# Altium PCB hat_template 2021V3.PcbDoc (part 1 of 2)
Units mm, origin at the board's own origin, x right, y up, seen from the top; angles counter-clockwise.
Board outline 64 x 85 mm, 4 copper layers (Top Side, Ground Plane, Power Plane, Bottom Side), stack 0.844 mm thick; 83 components, 57 nets, 300 pads, 72 vias.
Unrouted connection lines stored in the file: 1.
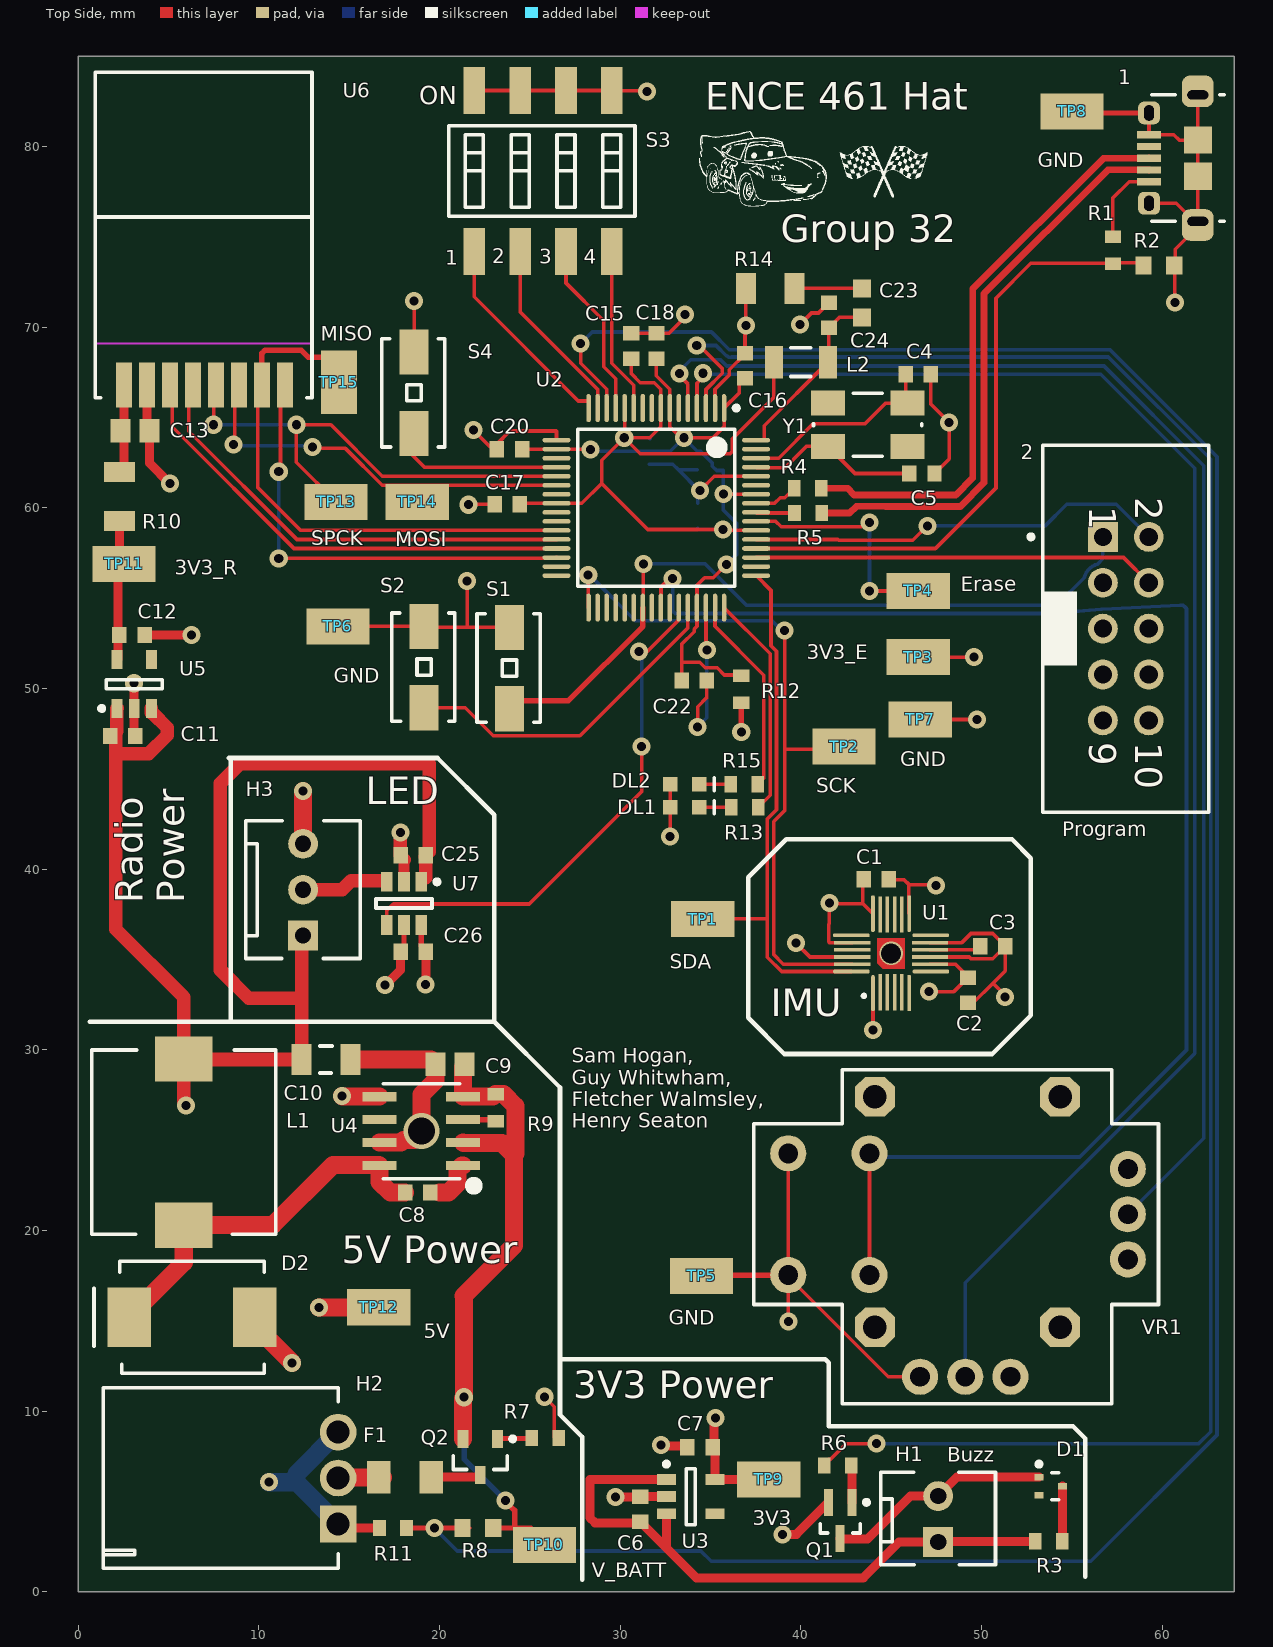
[diagram p0: Top Side view]
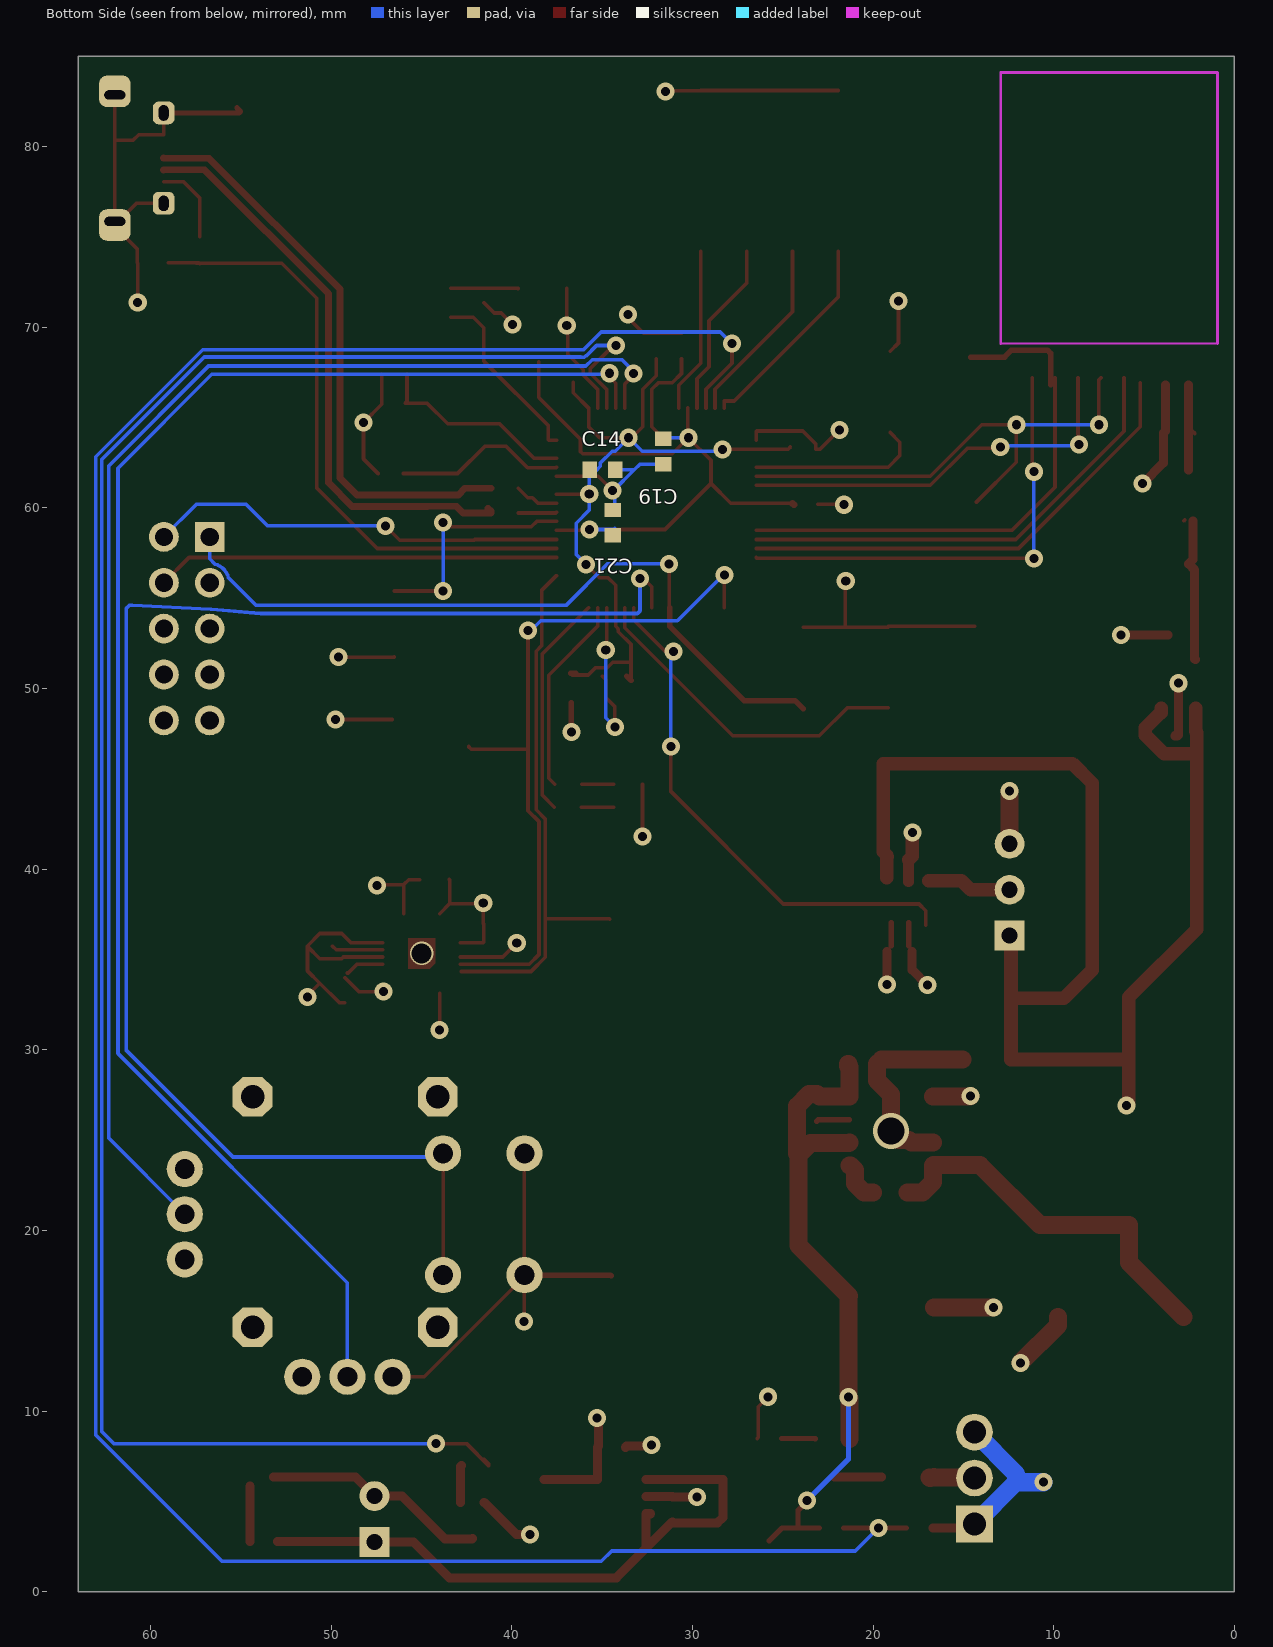
[diagram p1: Bottom Side view, seen from below]
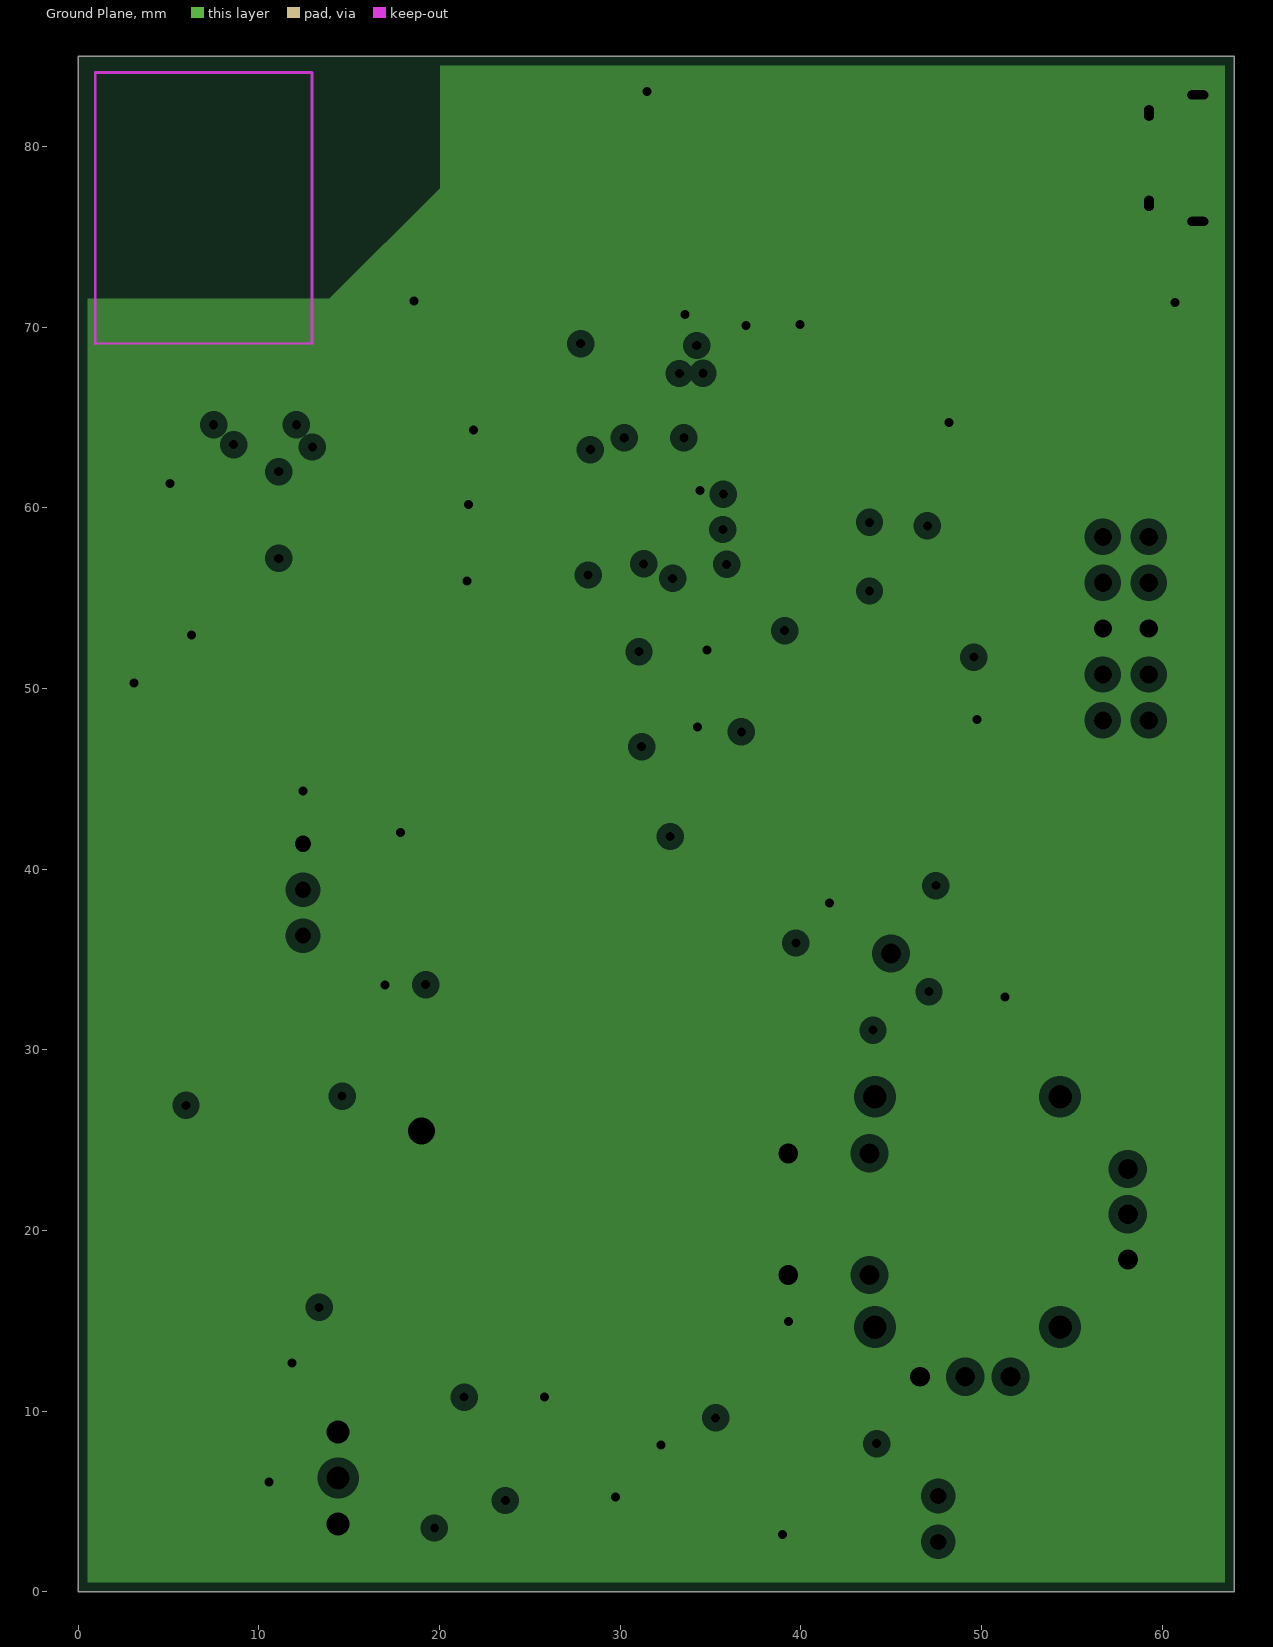
[diagram p2: Ground Plane, clearances drawn from the general rule]
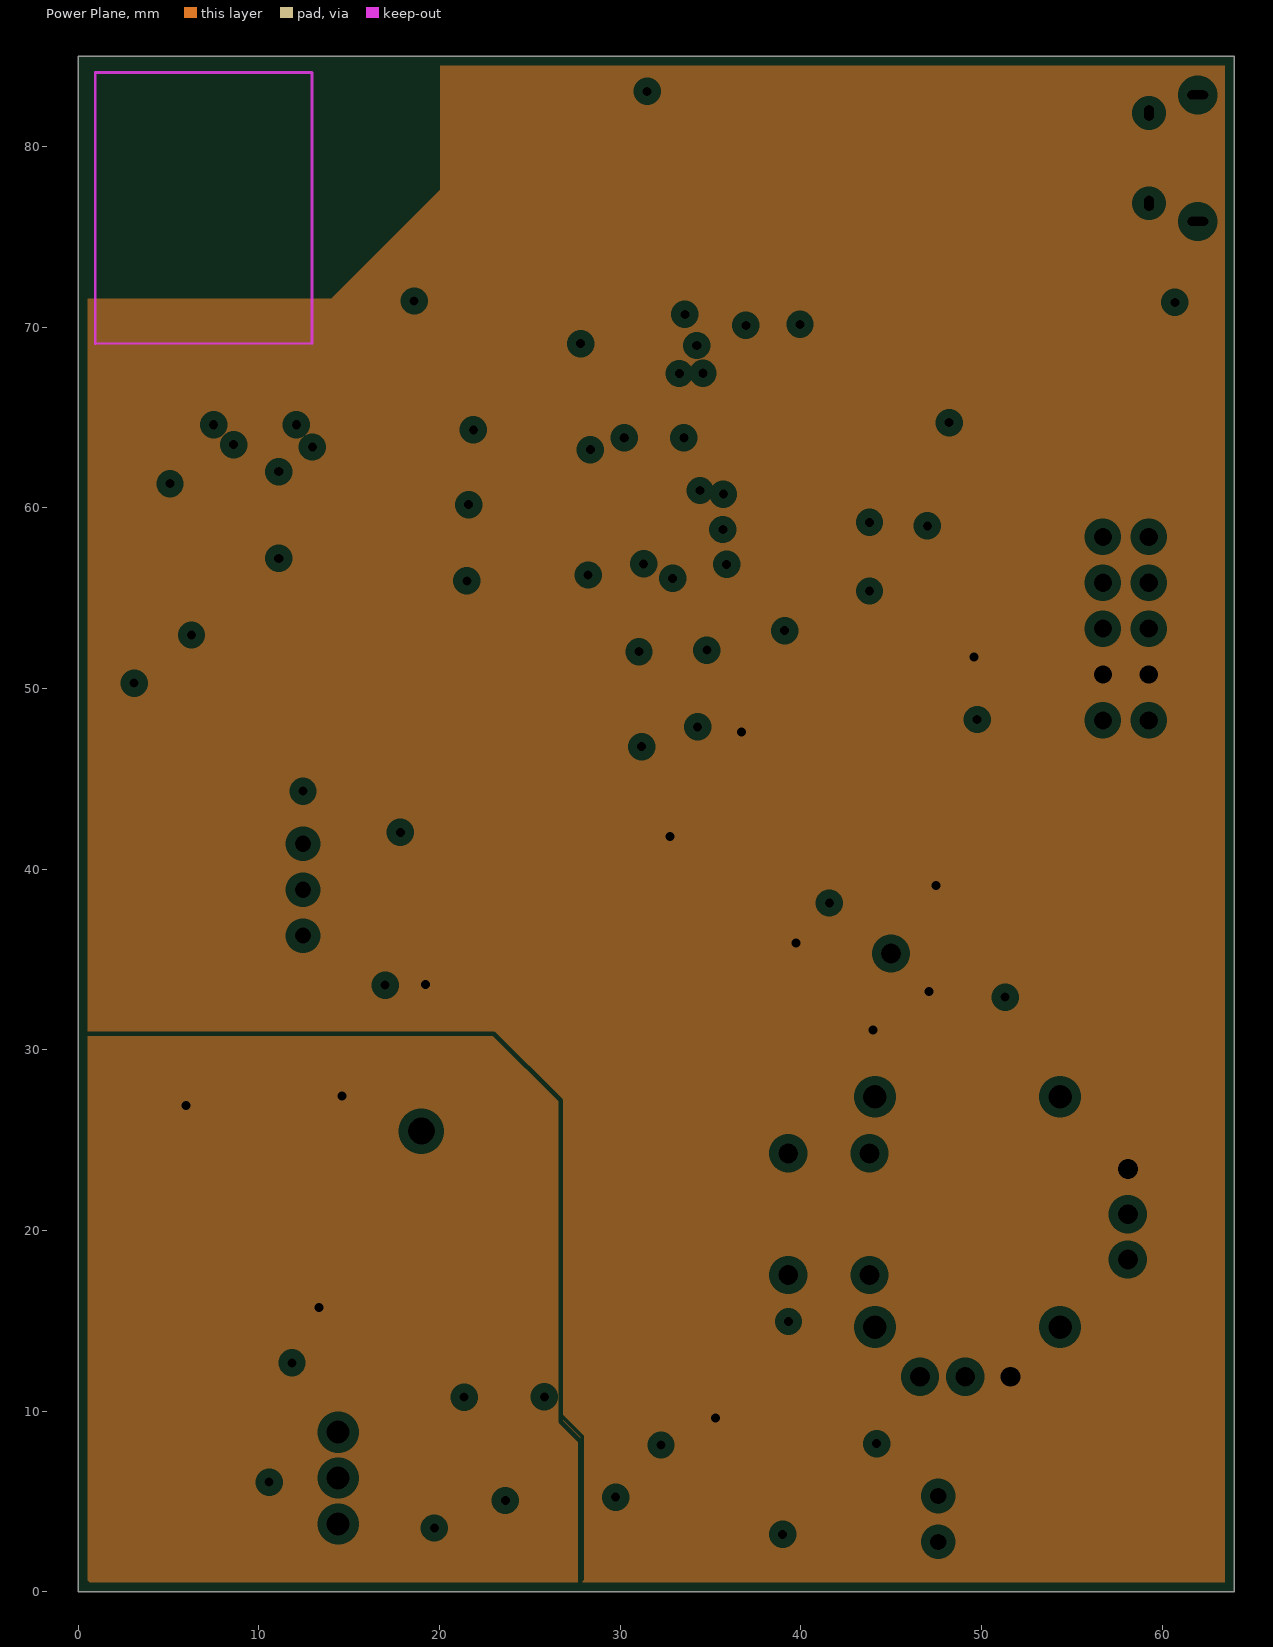
[diagram p3: Power Plane, clearances drawn from the general rule]

## Layer stack, top to bottom
Top Solder: solder mask 0.0102, Solder Resist, Dk 3.5
Top Side: signal copper 0.0356
Dielectric 1: core 0.32, FR-4, Dk 4.8
Ground Plane: plane copper 0.036, net GND
Dielectric 3: prepreg 0.127, Dk 4.2
Power Plane: plane copper 0.036, net 3V3
Dielectric 4: core 0.254, Dk 4.2
Bottom Side: signal copper 0.0356
Bottom Solder: solder mask 0.0102, Solder Resist, Dk 3.5

## Board outline
0,85 64,85 64,0 0,0 0,85

## Design rules (kind name [scope] priority, off if disabled: settings)
BoardOutlineClearance [All] p1: gap=0.5 ignorepadtopadclearanceinfootprint=FALSE
Clearance Min_Clearance_Circuit_Labs [All] p1: gap=0.15 ignorepadtopadclearanceinfootprint=FALSE except(0: Arc-Hole Track-Hole SMDPad-Hole THPad-Hole Via-Hole Fill-Hole Poly-Hole Region-Hole Text-Hole)
DiffPairsRouting [All] p1: maxlimit=0.254 minlimit=0.254 mostfreqgap=0.254 toplayer_minwidth=0.381 toplayer_maxwidth=0.381 toplayer_prefwidth=0.381 bottomlayer_minwidth=0.381 bottomlayer_maxwidth=0.381 bottomlayer_prefwidth=0.381 maxuncoupledlength=12.7
FanoutControl Fanout_BGA [IsBGA] p1 off: bgadir=Out bgaviamode=Centered fanoutstyle=Auto fanoutdirection=Alternating viagrid=0.025 // Fanout_BGA (Default Rule)
HoleSize [All] p1: absolutevalues=TRUE maxlimit=10 minlimit=0.3 maxpercent=80.000 minpercent=20.000
MinimumAnnularRing [All] p1: minimumring=0.1
MinimumSolderMaskSliver [All] p1: minsoldermaskwidth=0.1
NetAntennae [All] p1: netantennaetolerance=1
PasteMaskExpansion [All] p1 off: expansion=0.2
PlaneClearance [All] p1: clearance=0.508
PlaneConnect [All] p1: planeconnectstyle=Relief reliefexpansion=0.508 reliefentries=4 reliefconductorwidth=0.254 reliefairgap=0.254
PolygonConnect [All] p1: connectstyle=Relief reliefconductorwidth=0.254 reliefentries=4 polygonreliefangle="90 Angle" airgapwidth=0.254
RoutingVias [All] p1: holewidth=0.5 width=1 viastyle="Through Hole" minholewidth=0.3 minwidth=0.6 maxholewidth=1 maxwidth=2
SMDNeckDown [All] p1 off: percent=50.000
SMDToCorner [All] p1: distance=98425
SMDToPlane [All] p1: distance=1968504
SilkToSolderMaskClearance SilkscreenOverComponentPads [IsPad] p1: minsilkscreentomaskgap=0.254 clearancetoexposedcopper=TRUE
SolderMaskExpansion [All] p1: expansion=0.102
ViasUnderSMD [All] p1: allowed=FALSE
Width [All] p1: maxlimit=2 minlimit=0.15 preferedwidth=0.3
21 further rules are at their usual default settings.

## Classes and differential pairs
component class Hat: 1 2 C1 C2 C3 C4 C5 C6 C7 C8 C9 C10 C11 C12 C13 C14 C15 C16 C17 C18 C19 C20 C21 C22 C23 C24 C25 C26 D1 D2 DL1 DL2 F1 H1 H2 H3 L1 L2 Q1 Q2 R1 R2 R3 R4 R5 R6 R7 R8 R9 R10 R11 R12 R13 R14 R15 S1 S2 S3 S4 TP3 TP7 TP8 TP9 TP10 TP11 TP12 TP13 TP15 U1 U2 U3 U4 U5 U6 U7 VR1 Y1
differential pair D: +D_P -D_N

## Components (designator, comment, footprint, x,y, rotation, side; value= is the part's Value field where it differs from the comment)
1 "JS_USB_MICRO_B" FCI_USB_10118194-0001LF 63.423,79.357 r90 top
2 "Program" IDC2.54-V10D 57.988,53.315 r270 top
C1 "100nF" CAPC1608L 44.171,39.446 r180 top
C2 "10nF" CAPC1608L 49.251,33.299 r90 top
C3 "100nF" CAPC1608L 50.622,35.738 r0 top
C4 "27pF" CAPC1608L 46.5,67.4 r180 top
C5 "27pF" CAPC1608L 46.7,61.9 r180 top
C6 "1uF" CAPC1608L 31.115,4.572 r270 top
C7 "1uF" CAPC1608L 34.417,8.001 r0 top
C8 "100nF" CAPC1608L 18.796,22.098 r180 top
C9 "10uF" CAPC2012L 20.574,29.21 r0 top
C10 "47uF" CAPC3216L 13.716,29.464 r180 top
C11 "1uF" CAPC1608L 2.464,47.371 r180 top
C12 "1uF" CAPC1608L 2.972,52.959 r180 top
C13 "10uF" CAPC2012L 3.137,64.262 r180 top
C14 "100nF" CAPC1608L 34.976,62.103 r0 bottom
C15 "100nF" CAPC1608L 30.607,68.961 r90 top
C16 "100nF" CAPC1608L 36.906,67.869 r270 top
C17 "100nF" CAPC1608L 23.749,60.198 r180 top
C18 "100nF" CAPC1608L 32.004,68.961 r270 top
C19 "100nF" CAPC1608L 31.623,63.119 r270 bottom
C20 "100nF" CAPC1608L 23.876,63.246 r0 top
C21 "100nF" CAPC1608L 34.417,59.182 r90 bottom
C22 "100nF" CAPC1608L 34.098,50.444 r180 top
C23 "4.7uF" CAPC1608N 43.383,71.349 r90 top
C24 "100nF" CAPC1608L 41.554,70.663 r270 top
C25 "100nF" CAPC1608L 18.542,40.767 r180 top
C26 "100nF" CAPC1608L 18.542,35.433 r180 top
D1 "BAS16TT1G" SOT416 53.833,5.842 r270 top
D2 "SCHOTTKY 30V 4A" SMC 6.3,15.2 r180 top
DL1 "Bright Green" WL-SMCW0603 34.366,43.434 r180 top
DL2 "Blue" WL-SMCW0603 34.366,44.704 r180 top
F1 "5A" RESC3216N 18.085,6.35 r180 top
H1 "Buzz" MOLEX_KK_2_HDR 47.6,2.76 r90 top value="2 Pin Molex KK HDR"
H2 "Battery_HEADER_3pin" BATT_HEADER_3POS 14.387,6.297 r90 top
H3 "3 Pin Molex KK Hdr" MOLEX_KK_3_HDR 12.446,36.322 r90 top
L1 "IND 5.2UH 6A" INDUCTOR5u2 5.842,24.892 r90 top
L2 "1A max, Idc 0.3R," INDC3216L 40.005,68.072 r180 top
Q1 "BC817W" SOT323_M 42.179,3.953 r270 top
Q2 "SSM3J328R,LF" SOT23_L 22.25,7.468 r270 top
R1 "27K" RESC1608L 57.273,74.257 r90 top
R2 "47K" RESC1608N 59.817,73.406 r180 top
R3 "1K" RESC1608L 53.721,2.794 r0 top
R4 "27R" RESC1608L 40.386,61.087 r180 top
R5 "27R" RESC1608L 40.399,59.715 r180 top
R6 "1K" RESC1608L 42.037,6.985 r180 top
R7 "100K" RESC1608L 25.857,8.509 r180 top
R8 "47K" RESC1608N 22.123,3.531 r180 top
R9 "100K" RESC1608L 23.114,26.797 r90 top
R10 "1R" RESC3216L 2.286,60.626 r270 top
R11 "33K" RESC1608L 17.424,3.531 r180 top
R12 "0R" RESC1608L 36.703,49.962 r270 top
R13 "330R" RESC1608L 36.894,43.434 r0 top
R14 "1R" RESC3216L 38.307,72.143 r180 top
R15 "330R" RESC1608L 36.869,44.704 r0 top
S1 "EVQPNF05M" EVQPNF05M 23.876,51.13 r90 top
S2 "EVQPNF05M" EVQPNF05M 19.152,51.181 r90 top
S3 "WS_SW DIP-4" "DIP_SW_4WAY_SMD -" 21.92,74.2 r0 top
S4 "EVQPNF05M" EVQPNF05M 18.593,66.37 r90 top
TP1 "SDA" TP_1206 34.569,37.236 r0 top value=TP
TP2 "SCK" TP_1206 42.393,46.787 r0 top value=TP
TP3 "3V3_E" TP_1206 46.5,51.744 r0 top value=TP
TP4 "Erase" TP_1206 46.5,55.4 r0 top value=TP
TP5 "GND" TP_1206 34.505,17.487 r0 top value=TP
TP6 "GND" TP_1206 14.376,53.442 r0 top value=TP
TP7 "GND" TP_1206 46.609,48.285 r0 top value=TP
TP8 "GND" TP_1206 55.016,81.94 r0 top value=TP
TP9 "3V3" TP_1206 38.227,6.223 r0 top value=TP
TP10 "V_BATT" TP_1206 25.806,2.591 r0 top value=TP
TP11 "3V3_R" TP_1206 2.54,56.896 r0 top value=TP
TP12 "5V" TP_1206 16.637,15.748 r0 top value=TP
TP13 "SPCK" TP_1206 14.275,60.325 r180 top value=TP
TP14 "MOSI" TP_1206 18.771,60.325 r180 top value=TP
TP15 "MISO" TP_1206 14.427,66.954 r90 top value=TP
U1 "MPU-9250" QUAD24 43.993,33.985 r90 top locked
U2 "ATSAM4S8BA-ANR" LQFP64_L 32,60 r270 top locked
U3 "CAT6219-330TDGT3" SOT95P280X145-5N 33.909,5.269 r0 top
U4 "ADP2302ARDZ-5.0 BUCK" RD_8_1 19,25.5 r180 top locked value=Value
U5 "CAT6219-330TDGT3" SOT95P280X145-5N 3.099,50.245 r90 top
U6 "nRF24 SMD" NRF24 0.94,66.102 r0 top
U7 "SN74LVC1T45" SOT23-6_N 18.034,38.1 r270 top
VR1 "Joystick 10k with Sw" Joystick_Sw 58.1,20.9 r0 top
Y1 "12MHz" 6.0X3.5-4 43.7,64.6 r0 top

## Footprints (in the part's own frame and the unit in brackets; to place one, negate y for a bottom-side part, rotate by r counter-clockwise, add the part's x,y. Pads: shape width x height; smd on the part's side, far side on the other; paste and mask are expansions set on the pad)
6.0X3.5-4 [mm] "4 SMD 6.0X3.5 mm No Lead Crystal"
  rect 1.9x1.4 smd: 1(-2.2,-1.2) 2(2.2,-1.2) 3(2.2,1.2) 4(-2.2,1.2)
  silkscreen extent -3,-1.75 3,1.75, body extent -3,-1.75 3,1.75, height 1.2
BATT_HEADER_3POS [mil]
  rect 80x80 hole 50: 1(-100,0)
  round 80 hole 50: 2(0,0) 3(100,0)
  silkscreen extent -197,0 197,512
CAPC1608L [mm] "Chip Capacitor, Body 1.6x0.8mm, IPC High Density"
  rect 0.8x0.9 smd: 1(-0.7,0) 2(0.7,0)
  body extent -0.87,-0.48 0.87,0.48, height 0.85
CAPC1608N [mm] "Chip Capacitor, Body 1.6x0.8mm, IPC Medium Density"
  rect 1x1 smd: 1(-0.8,0) 2(0.8,0)
  body extent -0.87,-0.48 0.87,0.48, height 0.85
CAPC2012L [mm] "Chip Capacitor, Body 2.0x1.3mm, IPC High Density"
  rect 1.1x1.3 smd: 1(-0.8,0) 2(0.8,0)
  body extent -1.1,-0.72 1.1,0.72, height 1.1
CAPC3216L [mm] "Chip Capacitor, Body 3.2x1.6mm, IPC High Density"
  rect 1.1x1.7 smd: 1(-1.35,0) 2(1.35,0)
  silkscreen extent -0.35,-0.75 0.35,0.75, body extent -1.7,-0.9 1.7,0.9, height 1.35
"DIP_SW_4WAY_SMD -" [mm] "DIP Switch; 8 Leads"
  rect 1.2x2.6 smd: 1(0,0) 2(2.54,0) 3(5.08,0) 4(7.62,0) 5(7.62,8.89) 6(5.08,8.9) 7(2.54,8.9) 8(0,8.9)
  silkscreen extent -1.4,1.95 8.9,6.95
EVQPNF05M [mm] "Panansonic light touch SMD push button switch"
  rect 2.5x1.6 smd: 1(-2.25,0) 2(2.25,0)
  silkscreen extent -3,-1.7 3,1.8, body extent -3,-1.7 3,1.8, height 5
FCI_USB_10118194-0001LF [mm] "Micro USB B Type Receptacle"
  rect 0.4x1.35 smd mask+0.07: 1(-1.3,4.15) 2(-0.65,4.15) 3(0,4.15) 4(0.65,4.15) 5(1.3,4.15)
  rrect50% 1.75x1.75 hole 0.5 slot 1.15 at 90 deg copper offset -0.2,0 paste+0 mask+0.1: 6(-3.5,1.45)
  rrect50% 1.25x1.2 hole 0.55 slot 0.85 at 0 deg: 6(-2.5,4.15) 6(2.5,4.15)
  rect 1.5x1.55 smd: 6(-1,1.45) 6(1,1.45)
  rrect50% 1.75x1.75 hole 0.5 slot 1.15 at 90 deg copper offset 0.2,0 paste+0 mask+0.1: 6(3.5,1.45)
  silkscreen extent -3.5,0 3.5,4
IDC2.54-V10D [mm] "Connector; IDC, Low Profile Male Header, Thru-Hole; 10 Position; Vertical; Pitch 2.54 mm; Body 20.32 x 9.2 x 9.45 mm (LxWxH)"
  rect 1.65x1.65 hole 1: 1(-5.08,-1.27)
  round 1.65 hole 1: 2(-5.08,1.27) 3(-2.54,-1.27) 4(-2.54,1.27) 5(0,-1.27) 6(0,1.27) 7(2.54,-1.27) 8(2.54,1.27) 9(5.08,-1.27) 10(5.08,1.27)
  silkscreen extent -10.16,-5.37 10.16,4.6, body extent -10.16,-4.6 10.16,4.6, height 9.45
INDC3216L [mm] "Chip Inductor, Body 3.2x1.6mm, IPC High Density"
  rect 1x1.8 smd: 1(-1.5,0) 2(1.5,0)
  silkscreen extent -0.55,-0.8 0.55,0.8, body extent -1.75,-0.95 1.75,0.95, height 1.9
INDUCTOR5u2 [mm]
  rect 2.5x3.2 smd: 1(-4.6,0) 2(4.6,0)
  silkscreen extent -5.1,-5.1 5.1,5.1
Joystick_Sw [mm]
  round 2 hole 1.1: 1(0,2.5) 2(0,0) 3(0,-2.5) 4(-6.5,-9) 5(-9,-9) 6(-11.5,-9) 7(-14.3,-3.37) 8(-18.8,-3.37) 9(-18.8,3.37) 10(-14.3,3.37)
  oct 2.2x2.2 hole 1.3: 11(-14,-6.25) 12(-3.75,-6.25) 13(-14,6.5) 14(-3.75,6.5)
  silkscreen extent -20.7,-10.5 1.7,8
LQFP64_L [mm] "Thin QFP, 64-Leads, Body 10x10mm, Pitch 0.5mm, IPC High Density"
  oval 1.55x0.25 smd mask+0.07: 1(-5.525,3.75) 2(-5.525,3.25) 3(-5.525,2.75) 4(-5.525,2.25) 5(-5.525,1.75) 6(-5.525,1.25) 7(-5.525,0.75) 8(-5.525,0.25) 9(-5.525,-0.25) 10(-5.525,-0.75) 11(-5.525,-1.25) 12(-5.525,-1.75) 13(-5.525,-2.25) 14(-5.525,-2.75) 15(-5.525,-3.25) 16(-5.525,-3.75) 33(5.525,-3.75) 34(5.525,-3.25) 35(5.525,-2.75) 36(5.525,-2.25) 37(5.525,-1.75) 38(5.525,-1.25) 39(5.525,-0.75) 40(5.525,-0.25) 41(5.525,0.25) 42(5.525,0.75) 43(5.525,1.25) 44(5.525,1.75) 45(5.525,2.25) 46(5.525,2.75) 47(5.525,3.25) 48(5.525,3.75)
  oval 0.25x1.55 smd mask+0.07: 17(-3.75,-5.525) 18(-3.25,-5.525) 19(-2.75,-5.525) 20(-2.25,-5.525) 21(-1.75,-5.525) 22(-1.25,-5.525) 23(-0.75,-5.525) 24(-0.25,-5.525) 25(0.25,-5.525) 26(0.75,-5.525) 27(1.25,-5.525) 28(1.75,-5.525) 29(2.25,-5.525) 30(2.75,-5.525) 31(3.25,-5.525) 32(3.75,-5.525) 49(3.75,5.525) 50(3.25,5.525) 51(2.75,5.525) 52(2.25,5.525) 53(1.75,5.525) 54(1.25,5.525) 55(0.75,5.525) 56(0.25,5.525) 57(-0.25,5.525) 58(-0.75,5.525) 59(-1.25,5.525) 60(-1.75,5.525) 61(-2.25,5.525) 62(-2.75,5.525) 63(-3.25,5.525) 64(-3.75,5.525)
  silkscreen extent -5.65,-4.35 4.35,4.55, body extent -5,-5 5,5, height 1.6
MOLEX_KK_2_HDR [mil] "MOLEX_KK_2_HDR"
  rect 65x65 hole 35.43: 1(0,0)
  round 65 hole 35.43: 2(100,0)
  silkscreen extent -50,-125 152,125, body extent -44,-121 146,119, height 630
MOLEX_KK_3_HDR [mil] "MOLEX_KK_3_HDR"
  rect 65x65 hole 35.43: 1(0,0)
  round 65 hole 35.43: 2(100,0) 3(200,0)
  silkscreen extent -50,-125 250,125, body extent -44,-120 244,119, height 630
NRF24 [mm]
  rect 0.9x2.5 smd: 1(1.6,0.7) 2(2.871,0.7) 3(4.143,0.7) 4(5.414,0.7) 5(6.686,0.7) 6(7.957,0.7) 7(9.229,0.7) 8(10.5,0.7)
  Keep-Out Layer lines w0.1: 0,3 12,3
  Keep-Out Layer lines w0.15: 0,3 0,18 12,18 12,3
  silkscreen extent 0,0 12,18
QUAD24 [mm]
  oval 2x0.2 smd paste+0.02 mask+0.015: 1(-0.85,0)
  rect 2x0.2 smd paste+0.02 mask+0.015: 2(-0.8,-0.4) 3(-0.8,-0.8) 4(-0.8,-1.2) 5(-0.8,-1.6) 14(3.5,-1.6) 15(3.5,-1.2) 16(3.5,-0.8) 17(3.5,-0.4)
  rrect50% 2x0.2 smd paste+0.02 mask+0.015: 6(-0.85,-2) 13(3.55,-2) 18(3.55,0)
  rrect50% 0.2x2 smd paste+0.02 mask+0.015: 7(0.35,-3.2) 12(2.35,-3.2) 19(2.35,1.2) 24(0.35,1.2)
  rect 0.2x2 smd paste+0.02 mask+0.015: 8(0.75,-3.15) 9(1.15,-3.15) 10(1.55,-3.15) 11(1.95,-3.15) 20(1.95,1.15) 21(1.55,1.15) 22(1.15,1.15) 23(0.75,1.15)
  Top Side region: 0.5,-1.75 0.5,-0.55 0.8,-0.25 2.2,-0.25 2.2,-1.75
  silkscreen extent -1.05,0.45 -0.95,0.55
RD_8_1 [mil]
  rect 74x20 smd paste+0 mask+0: 1(-91,75) 2(-91,25) 3(-91,-25) 4(-91,-75) 5(91,-75) 6(91,-25) 7(91,25) 8(91,75)
  rrect50% 7.87x78.74 smd paste+0.79 mask+0.59: EPAD(0,0)
  silkscreen extent -118,-104 84,123, body extent 0,0 10,10, height 10
RESC1608L [mm] "Chip Resistor, Body 1.6x0.8mm, IPC High Density"
  rect 0.7x0.9 smd: 1(-0.75,0) 2(0.75,0)
  body extent -0.85,-0.48 0.85,0.48, height 0.9
RESC1608N [mm] "Chip Resistor, Body 1.6x0.8mm, IPC Medium Density"
  rect 0.9x1 smd: 1(-0.85,0) 2(0.85,0)
  body extent -0.85,-0.48 0.85,0.48, height 0.6
RESC3216L [mm] "Chip Resistor, Body 3.1x1.6mm, IPC High Density"
  rect 1.1x1.7 smd: 1(-1.35,0) 2(1.35,0)
  body extent -1.68,-0.87 1.68,0.87, height 2.54
RESC3216N [mm] "Chip Resistor, Body 3.2x1.6mm, IPC Medium Density"
  rect 1.3x1.8 smd: 1(-1.45,0) 2(1.45,0)
  body extent -1.68,-0.87 1.68,0.87, height 0.71
SMC [mm] "DO-214-AB/SMC; 2 C-Bend Leads; Body 7.9 x 5.9 mm, inc. leads (LxW)"
  rect 2.4x3.3 smd: 1(-3.475,0) 2(3.475,0)
  silkscreen extent -4,-3.1 5.43,3.1
SOT23-6_N [mm]
  rect 1.1x0.65 smd: 1(-1.2,0.95) 2(-1.2,0) 3(-1.2,-0.95) 4(1.2,-0.95) 5(1.2,0) 6(1.2,0.95)
  silkscreen extent -1.32,-1.55 0.25,1.95, body extent -0.9,-1.55 0.9,1.55, height 1.45
SOT23_L [mm] "SOT23, 3-Leads, Body 2.9x1.3mm, Pitch 0.95mm, Lead Span 2.3mm, IPC High Density"
  rect 1x0.6 smd: 1(-1,0.95) 2(-1,-0.95) 3(1,0)
  silkscreen extent -1.12,-1.5 0.7,1.93, body extent -0.7,-1.5 0.7,1.5, height 1.1
SOT95P280X145-5N [mm] "SOT23, 5-Leads, Body 2.90x2.80mm, Pitch 0.95mm, IPC Medium Density"
  rect 1.05x0.6 smd: 1(-1.35,0.95) 2(-1.35,0) 3(-1.35,-0.95) 4(1.35,-0.95) 5(1.35,0.95)
  silkscreen extent -1.47,-1.55 0.25,1.92, body extent -0.87,-1.52 0.87,1.53, height 1.45
SOT323_M [mm] "SOT323, 3-Leads, Body 2.0x1.3mm, Pitch 0.65mm, Lead Span 2.1mm, IPC Low Density"
  rect 1.5x0.5 smd: 1(-1,0.65) 2(-1,-0.65) 3(1,0)
  silkscreen extent -1.12,-1.1 0.7,1.58, body extent -0.7,-1.1 0.7,1.1, height 1.1
SOT416 [mm] "SOT-416 Leads; Body 1.8 x 1.8 mm, inc. leads (LxW max)"
  rect 0.35x0.5 smd: 1(-0.5,-0.65) 2(0.5,-0.65) 3(0,0.65)
  silkscreen extent -1.35,-0.77 0.75,0.45
TP_1206 [mm] "Test Point Pad"
  rect 3.5x2 smd: 1(0,0)
  body extent -1.62,-0.85 1.63,0.8, height 2
WL-SMCW0603 [mm] "2.4 x 0.8 x 0.7mm LED"
  rect 0.8x0.8 smd: 1(0,0) 2(1.6,0)
  silkscreen extent -0.85,-0.35 -0.85,0.35

## Part data
1: library part JS_USB_MICRO_B_SMT, "CONN USB MICRO B RECPT SMT R/A", Manufacturer=FCI, Manufacturer Part Number=10118194-0001LF, Supplier Part Number 1=609-4618-1-ND, Features="Shielded, Solder Retention", Gender=Receptacle, Mounting Type="Surface Mount, Right Angle, Horizontal", Number of Contacts=5, Specifications="USB 2.0", Supplier 1=Digi-Key
2: library part JA_HDR_IDC_5X2_VERT, "IDC Header, 2,54mm, 10-Pin, Vert", Supplier Part Number 1=1096985, Storage Location="ECE Dept Store", Supplier="ECE Dept", Supplier 1=Farnell
C1 C3 C8 C14 C15 C16 C17 C18 C19 C20 C21 C22 C24 C25 C26: library part CC_100nF_0603, "CAP CER 100nF X7R +-10% 50V 0603", Code_IPC="1608 [0603]", PackageReference=0603, Storage Location="PCB Assembly WS", Supplier="ECE Dept"
C2: library part CC_10nF_0603, "CAP CER 10nF X7R +-10% 50V 0603", Code_IPC="1608 [0603]", PackageReference=0603, Storage Location="PCB Assembly WS", Supplier="ECE Dept"
C4 C5: library part CC_27pF_0603, "CAP CER 27pF NPO/COG +-5% 50V 0603", Code_IPC="1608 [0603]", PackageReference=0603, Storage Location="PCB Assembly WS", Supplier="ECE Dept"
C6 C7 C11 C12: library part CC_1uF_0603, "CAP CER 1uF Y5V -20% +80% 16V 0603", Max Voltage=16V, Code_IPC="1608 [0603]", PackageReference=0603, Storage Location="PCB Assembly WS", Supplier="ECE Dept"
C9 C13: library part CC_10uF_16V_0805, "CAP CER 10uF X5R 16V 0805", Manufacturer="Samsung Electro-Mechanics", Manufacturer Part Number=CL21A106KOQNNWE, Max Voltage=16V, Operating Temperature="-55°C ~ 85°C", Package / Case="0805 (2012 Metric)", Ratings=-, Supplier Part Number 1=1276-2894-1-ND, Temperature Coefficient=X5R, Tolerance=±10%, Applications="General Purpose", Category=Capacitors, Code_IPC=2012[0805], ComponentLink1Description=http://www.samsungsem.com/kr/support/product-search/mlcc/CL21A106KOQNNWE.jsp, ComponentLink1URL=http://www.samsungsem.com/kr/support/product-search/mlcc/CL21A106KOQNNWE.jsp, Features=-, Height - Seated (Max)=-, Lead Spacing=-, Lead Style=-, Mounting Type="Surface Mount, MLCC", Note="Footprint corresponds to dimensions for bulk cassette packaging. This case size has tightened tolerances.", Notification="Current market demand for these product types have resulted in fluctuating and extending lead times. Lead times may differ.", PackageReference=0805, Packaging="Cut Tape (CT)", Part Status=Active, Pricing 1="1=0.35, 10=0.25, 100=0.1178, 500=0.08254, 1000=0.06831 (NZD)", RoHS="RoHS Compliant", Size / Dimension="0.079\" L x 0.049\" W (2.00mm x 1.25mm)", Stock 1=20000, Supplier 1=Digi-Key, Thickness (Max)="0.055\" (1.40mm)", Voltage - Rated=16V
C10: library part CC_47uF_1206, "CAP CER 47uF X5R -/+20% 6V 1206", Dielectric=X5R, Max Voltage=6V, MoV=6V, Storage Location="PCB Assembly WS", Supplier="ECE Dept"
C23: library part CC_4.7uF_0603, "CAP CER 4.7uF X5R +-20%  10V 0603", Max Voltage=10V, Code_IPC=2012[0805], Note="Footprint corresponds to dimensions for bulk cassette packaging. This case size has tightened tolerances.", PackageReference=0805, Storage Location="PCB Assembly WS", Supplier="ECE Dept"
D1: library part DR_BAS16TT1G, "Diode Switching, Vr 75V, 200mA, SOT-416", Average Rectified Current=200mA, Case/Package=SOT-416-3, Forward Voltage=1.25V, Manufacturer="ON Semiconductor", Max Forward Surge Current (Ifsm)=500mA, Max Operating Temperature=150°C, Max Repetitive Reverse Voltage (Vrrm)=75V, Max Reverse Voltage (DC)=100V, Min Operating Temperature=-55°C, Package Quantity=1, Peak Reverse Current=1uA, Power Dissipation=225mW, Supplier Part Number 1=BAS16TT1GOSDKR-ND, ComponentLink1Description=https://datasheet.ciiva.com/8299/bas16tt1-d-8299729.pdf, ComponentLink1URL=https://datasheet.ciiva.com/8299/bas16tt1-d-8299729.pdf, ComponentLink2Description=https://datasheet.ciiva.com/4435/bas16tt1-d-103455-4435027.pdf, ComponentLink2URL=https://datasheet.ciiva.com/4435/bas16tt1-d-103455-4435027.pdf, ComponentLink3Description=https://datasheet.ciiva.com/28646/bas16tt1-d-28646580.pdf, ComponentLink3URL=https://datasheet.ciiva.com/28646/bas16tt1-d-28646580.pdf, ComponentLink4Description=https://datasheet.ciiva.com/16393/bas16tt1-d-16393622.pdf, ComponentLink4URL=https://datasheet.ciiva.com/16393/bas16tt1-d-16393622.pdf, ComponentLink5Description=https://datasheet.ciiva.com/923/bas16tt1-d-923016.pdf, ComponentLink5URL=https://datasheet.ciiva.com/923/bas16tt1-d-923016.pdf, ComponentLink6Description=https://datasheet.ciiva.com/923/bas16tt1-d-923017.pdf, ComponentLink6URL=https://datasheet.ciiva.com/923/bas16tt1-d-923017.pdf, ComponentLink7Description=https://datasheet.ciiva.com/923/bas16tt1-d-923018.pdf, ComponentLink7URL=https://datasheet.ciiva.com/923/bas16tt1-d-923018.pdf, ComponentLink8Description=https://datasheet.ciiva.com/25930/bas16tt1-d-25930986.pdf, ComponentLink8URL=https://datasheet.ciiva.com/25930/bas16tt1-d-25930986.pdf, Contact Plating=Tin,Matte, Current Rating=200mA, Element Configuration=Single, Forward Current=200mA, Halogen Free="Halogen Free", Height=0.9mm, Lead Free="Lead Free", Length=1.65mm, Manufacturer Part Number=BAS16TT1G, Manufacturer PN=BAS16TT1G, Max Surge Current=500mA, Number of Pins=3, Output Current=200mA, Packaging="Tape and Reel", Peak Non-Repetitive Surge Current=500mA, Polarity=Standard, Radiation Hardening=No, REACH SVHC="No SVHC", Recovery Time=6ns, Reverse Recovery Time=6ns, Storage Location="PCB Assembly WS", Supplier="ECE Dept", Supplier 1=Digi-Key, Supplier 2=Farnell, Supplier Part Number 2=2844752, Width=0.9mm
D2: library part MBRS330T3G, "DIODE SCHOTTKY 30V 4A SMC", Base Part Number=MBRS330, Capacitance @ Vr, F=-, Current - Average Rectified (Io)=4A, Manufacturer="ON Semiconductor", Operating Temperature - Junction="-65°C ~ 150°C", Package / Case="DO-214AB, SMC", Supplier Device Package=SMC, Supplier Part Number 1=MBRS330T3GOSCT-ND, Category="Discrete Semiconductor Products", ComponentLink1Description=http://www.onsemi.com/pub/Collateral/MBRS340T3-D.PDF, ComponentLink1URL=http://www.onsemi.com/pub/Collateral/MBRS340T3-D.PDF, Diode Type=Schottky, Manufacturer Part Number=MBRS330T3G, Mounting Type="Surface Mount", Packaging="Cut Tape (CT)", Part Status=Active, Pricing 1="1=0.93, 10=0.79, 100=0.5902, 500=0.46368, 1000=0.35829 (NZD)", RoHS="RoHS Compliant", Speed="Fast Recovery =< 500ns, > 200mA (Io)", Stock 1=8919, Supplier 1=Digi-Key
DL1: library part DL_150060VS75000, "LED Bright Green 40mcd 0603 SMD", Forward Current If=30, Forward Voltage=2, Manufacturer="WURTH ELEKTRONIK", Manufacturer Part Number=150060VS75000, Supplier Part Number 1=2322073, LED Colour="Bright Green", LED Mounting=SMD, Luminous Intensity=40, Storage Location="PCB Assembly WS", Supplier="ECE Dept", Supplier 1=Farnell, Viewing Angle=140°, Wavelength Typ=570
DL2: library part DL_150060BS75000, "LED Blue 270mcd 0603 SMD", Forward Current If=30, Forward Voltage=3.2, Manufacturer="WURTH ELEKTRONIK", Manufacturer Part Number=150060BS75000, Supplier Part Number 1=2322069, LED Colour=Blue, Luminous Intensity=270, Pricing="1=0.3844, 50=0.3252, 100=0.2957, 500=0.2365 (NZD)", Storage Location="PCB Assembly WS", Supplier="ECE Dept", Supplier 1=Farnell, Viewing Angle=120°, Wavelength Typ=470
F1: library part FS_Fuse_5.0A, "Fuse 5.0A Fast Acting 1206 SMD", Case/Package=1206, Case Code (Metric)=3216, DC Cold Resistance=19mR, Manufacturer="Bel TRP", Manufacturer Part Number=C1F5, Max Operating Temperature=125°C, Min Operating Temperature=-55°C, Supplier Part Number 1=507-1886-1-ND, Voltage Rating=125V, Voltage Rating (DC)=63V, Approvals=CE,cURus, Case Code (Imperial)=1206, ComponentLink1Description=http://www.farnell.com/datasheets/2571625.pdf, ComponentLink1URL=http://www.farnell.com/datasheets/2571625.pdf, ComponentLink2Description=http://belfuse.com/pdfs/C1F.pdf, ComponentLink2URL=http://belfuse.com/pdfs/C1F.pdf, ComponentLink3Description=http://www.mouser.com/ds/2/643/C1F-594910.pdf, ComponentLink3URL=http://www.mouser.com/ds/2/643/C1F-594910.pdf, ComponentLink4Description=https://belfuse.com/resources/StewartConnector/C1F.pdf, ComponentLink4URL=https://belfuse.com/resources/StewartConnector/C1F.pdf, Contact Plating=Nickel,Tin, Current Rating=5A, Fuse Type="Board Mount (Cartridge Style Excluded)", Length=0.126inch, Mount="Surface Mount", Number of Pins=2, Packaging="Tape and Reel", Pricing 1="1=0.32, 5=0.312, 10=0.298, 50=0.2662, 100=0.2479, 250=0.22032, 500=0.1836, 1000=0.17442 (USD)", Stock 1=725, Supplier 1=Digi-Key, Supplier 2=Element14, Supplier Part Number 2=2848595, Voltage Rating (AC)=125V, Width=0.062inch
H1: library part JA_MOLEX_KK_2POS, "CONN HEADER 2POS 2.54mm VERT_Thru Hole", Supplier Part Number 1=1462926, Storage Location="ECE Dept Store", Supplier="ECE Dept", Supplier 1=Farnell
H2: "3Pin Header 2.54mm spacing"
H3: library part JA_MOLEX_KK_3POS, "CONN HEADER 3POS 2.54mm VERT_Thru Hole", Manufacturer=Molex, Manufacturer PN=22-23-2031, Supplier Part Number 1=9731156, Storage Location="ECE Dept Store", Supplier="ECE Dept", Supplier 1=Farnell
L1: library part CDRH104RNP-5R2NC, "FIXED IND 5.2UH 6A 22 MOHM SMD", Current - Saturation=5.6A, DC Resistance (DCR)="22 mOhm Max", Frequency - Self Resonant=-, Manufacturer="Sumida America Components Inc.", Operating Temperature="-40°C ~ 100°C", Package / Case=Nonstandard, Supplier Part Number 1=308-2280-1-ND, Tolerance=±30%, Category="Inductors, Coils, Chokes", ComponentLink1Description=http://products.sumida.com/products/pdf/CDRH104R.pdf, ComponentLink1URL=http://products.sumida.com/products/pdf/CDRH104R.pdf, Height - Seated (Max)="0.157\" (4.00mm)", Manufacturer Part Number=CDRH104RNP-5R2NC, Material - Core=Ferrite, Mounting Type="Surface Mount", Packaging="Cut Tape (CT)", Part Status=Active, Pricing 1="1=2.9, 10=2.678, 100=1.8743, 500=1.5173 (NZD)", Q @ Freq=-, Ratings=-, RoHS="RoHS Compliant", Shielding=Shielded, Size / Dimension="0.402\" L x 0.394\" W (10.20mm x 10.00mm)", Stock 1=3849, Supplier 1=Digi-Key, Supplier Device Package=-, Type=-
L2: library part IN_Ferrite-Bead, "Ferrite Bead, Rdc 0.3R, Z100MHZ 600R, Imax 1A, SMD 1206", DC Current Rating=1, DC Resistance Max=0.08, Ferrite Case Style="1206 ^3216 Metric]", Frequency Range="50MHz to 1", Impedance Tolerance="± 25%", Manufacturer=FAIR-RITE, Manufacturer Part Number=2512066017Y1, Supplier Part Number 1=1612060, Ferrite Mounting=SMD, Impedance=600, Manufacturer PN=2512066017Y1, Storage Location="PCB Assembly WS", Supplier="ECE Dept", Supplier 1=Farnell
Q1: library part TB_BC817W, "NPN GP Bipolar Transistor 45V 500mA SOT323", Manufacturer=NXP, Supplier Part Number 1=2114873, Manufacturer PN=BC817W, Storage Location="PCB Assembly WS", Supplier="ECE Dept", Supplier 1=Farnell
Q2: library part TM_SSM3J328R, "MOSFET P-CH 20V 6A SOT23-3", Case/Package=SOT-23-3, Continuous Drain Current (ID)=6A, Drain to Source Breakdown Voltage=-20V, Drain to Source Resistance=47.4mR, Drain to Source Voltage (Vdss)=20V, Gate to Source Voltage (Vgs)=8V, Input Capacitance=840pF, Input Capacitance (Ciss) @ Vds="840pF @ 10V", Manufacturer=Toshiba, Max Operating Temperature=150°C, Max Power Dissipation=1W, Min Operating Temperature=-55°C, Package / Case="SOT-23-3 Flat Leads", Package Quantity=3000, Power Dissipation=2W, Supplier Device Package=SOT-23F, Supplier Part Number=SSM3J328RLFDKR-ND, ComponentLink1Description=https://datasheet.ciiva.com/11158/ssm3j328r-datasheet-en-20140301-11158652.pdf, ComponentLink1URL=https://datasheet.ciiva.com/11158/ssm3j328r-datasheet-en-20140301-11158652.pdf, Current - Continuous Drain (Id) @ 25° C=6A, Element Configuration=Single, FET Feature="Logic Level Gate, 1.5V Drive", FET Type="MOSFET P-Channel, Metal Oxide", Gate Charge (Qg) @ Vgs="12.8nC @ 4.5V", Manufacturer Part Number=SSM3J328R,LF, Mount="Surface Mount", Number of Channels=1, Number of Elements=1, Number of Pins=3, Packaging="Tape and Reel", Power - Max=1W, Pricing="1=0.79, 10=0.658, 25=0.5772, 100=0.4939, 250=0.42836, 500=0.36284, 1000=0.27972 (NZD)", Radiation Hardening=No, Rds On Max=29.8mR, Storage Location="PCB Assembly WS", Supplier=Digi-Key, Supplier 1=Digi-Key, Supplier Part Number 1=SSM3J328RLFDKR-ND, Turn-Off Delay Time=107ns, Turn-On Delay Time=32ns, Vgs(th) (Max) @ Id="1V @ 1mA"
R1: library part RS_27K, "RES 27K OHM 1/10W 5% 0603 SMD", Storage Location="PCB Assembly WS", Supplier="ECE Dept"
R2 R8: library part RS_47K, "RES 47.0K OHM 1/10W 5% 0603 SMD", Storage Location="PCB Assembly WS", Supplier="ECE Dept"
R3 R6: library part RS_1K, "RES 1.0K OHM 1/10W 5% 0603 SMD", Storage Location="PCB Assembly WS", Supplier="ECE Dept"
R4 R5: library part RS_27R, "RES 27 OHM 1/10W 5% 0603 SMD", Storage Location="PCB Assembly WS", Supplier="ECE Dept"
R7 R9: library part RS_100K, "RES 100K OHM 1/10W 5% 0603 SMD", Storage Location="PCB Assembly WS", Supplier="ECE Dept"
R10 R14: library part RT_1R, "RES 1R OHM 1/4W 5% 1206 SMD", Storage Location="PCB Assembly WS", Supplier="ECE Dept"
R11: library part RS_33K, "RES 33.0K OHM 1/10W 5% 0603 SMD", Storage Location="PCB Assembly WS", Supplier="ECE Dept"
R12: library part RS_0R0, "RES 0.0 OHM 1/10W 5% 0603 SMD", Storage Location="PCB Assembly WS", Supplier="ECE Dept"
R13 R15: library part RS_330R, "RES 330 OHM 1/10W 5% 0603 SMD", Storage Location="PCB Assembly WS", Supplier="ECE Dept"
S1 S2 S4: library part WS_EVQPNF05M, "Panasonic 6 x 3.5mm SMD Light Touch Switch Type SMD", Manufacturer=Panasonic, Supplier Part Number 1=2079481, Manufacturer PN=EVQPNF05M, PackageDescription="6.0 x 3.5 mm", Storage Location="PCB Assembly WS", Supplier="ECE Dept", Supplier 1=Farnell, Supplier 2=Digi-Key, Supplier Part Number 2=P13598SCT-ND
S3: "DIP Switch, 4 Position, SPST SMD", Contact Current DC Max=25, Manufacturer="OMRON ELECTRONIC COMPONENTS", Manufacturer Part Number=A6SN-4101, Supplier Part Number 1=2029425, Contact Configuration=SPST, External Length / Height=12.1, No. of Switch Positions=4, Pitch Spacing=2.54, Storage Location="PCB Assembly WS", Supplier="ECE Dept", Supplier 1=Farnell
TP1 TP2 TP3 TP4 TP5 TP6 TP7 TP8 TP9 TP10 TP11 TP12 TP13 TP14 TP15: library part TP_1206, "Test-Point 3.3x1.6x2.1mm SMD", Manufacturer="Harwin Inc", Manufacturer Part Number=S1751-46R, Supplier Part Number 1=952-1478-2-ND, Mounting Type="Surface Mount", Storage Location=ProtoPlace, Supplier="ECE Dept", Supplier 1=Digi-Key, Supplier 2=Farnell, Supplier Part Number 2=1826282, Type="PC Test Point"
U1: "9 axis IMU"
U2: library part SE_ATSAM4S16BA-MU, "IC MCU 32BIT 512KB FLASH 64LQFP", Manufacturer=Atmel, Package / Case=64-LQFP, Supplier Part Number 1=ATSAM4S8BA-ANRCT-ND, Voltage - Supply (Vcc/Vdd)="1.62 V ~ 3.6 V", Code_JEDEC=MO-220VMMD-3, ComponentLink1Description="Manufacturer URL", ComponentLink1URL=http://www.atmel.com/, ComponentLink2Description="SAM4S Series Datasheet", ComponentLink2URL=http://www.atmel.com/dyn/resources/prod_documents/11100.pdf, ComponentLink3Description="SAM4S Series Summary", ComponentLink3URL=http://www.atmel.com/dyn/resources/prod_documents/11100S.pdf, Connectivity="I²C, IrDA, Memory Card, SPI, SSC, UART/USART, USB", Core Processor="ARM® Cortex®-M4", Core Size=32-Bit, Data Converters="A/D 11x12b, D/A 2x12b", Manufacturer Part Number=ATSAM4S8BA-ANR, Number of I/O=47, PackageDescription="64-Pin Quad Flat No-Lead (QFN) Sawn, 9 x 9 x 1.0 mm Body, 0.5 mm Pitch, Exposed Pad", PackageReference=64PS, PackageVersion="revJ, Jul-2007", Packaging="Cut Tape (CT)", Peripherals="Brown-out Detect/Reset, DMA, POR, PWM, WDT", Program Memory Size="512KB (512K x 8)", Program Memory Type=FLASH, RAM Size="128K x 8", Speed=120MHz, Supplier 1=Digi-Key
U3 U5: library part SV_CAT6219-330TDGT3, "IC REG LIN 3.3V 500MA TSOT23-5", Base Part Number=CAT6219, Current - Output=500mA, Package / Case="SOT-23-5 Thin, TSOT-23-5", Supplier Device Package=TSOT-23-5, Supplier Part Number=CAT6219-330TDGT3CT-ND, Voltage - Input (Max)=5.5V, Voltage - Output (Min/Fixed)=3.3V, Voltage Dropout (Max)="0.5V @ 500mA", ComponentLink1Description=http://www.onsemi.com/pub/Collateral/CAT6219-D.PDF, ComponentLink1URL=http://www.onsemi.com/pub/Collateral/CAT6219-D.PDF, Manufacturer Part Number=CAT6219-330TDGT3, Supplier=Digi-Key, Supplier 1=Digi-Key
U4: library part ADP2302ARDZ-5.0-R7, "IC REG BUCK 5V 2A 8SOIC", Current - Output=2A, Frequency - Switching=700kHz, Supplier Part Number 1=ADP2302ARDZ-5.0-R7CT-ND, Voltage - Input (Max)=20V, Voltage - Output (Min/Fixed)=5V, Manufacturer_Part_Number=ADP2302ARDZ-5.0-R7, Output Type=Fixed, Supplier 1=Digi-Key, Type=DEV, Vendor="Analog Devices Inc"
U6: library part NRF24, "nRF24 SMD Module", Warning="No power planes near or under device"
U7: "1.8V - 5V level converter"
VR1: "JOYSTICK 10K OHM 2 AXIS TH", Manufacturer 1=SparkFun, Manufacturer Part Number 1=COM-09032, Supplier Part Number 1=1568-1526-ND, ComponentLink1Description=https://media.digikey.com/pdf/Data%20Sheets/Sparkfun%20PDFs/COM-09032_Web.pdf?src-supplier=Digi-Key, ComponentLink1URL=https://media.digikey.com/pdf/Data%20Sheets/Sparkfun%20PDFs/COM-09032_Web.pdf?src-supplier=Digi-Key, Pricing 1="1=3.95000 (USD)", RoHS=No, Stock 1=563, Supplier 1=Digi-Key
Y1: library part XT_CRYSTAL_12MHz_18pF, "CRYSTAL 12MHZ 18PF 6X3.5mm SMD", ESR (Equivalent Series Resistance)="60 Ohm", Frequency Stability=±50ppm, Frequency Tolerance=±30ppm, Load Capacitance=18pF, Manufacturer="CTS-Frequency Controls", Manufacturer Part Number=406C35D12M00000, Operating Mode=Fundamental, Operating Temperature="-20°C ~ 70°C", Package / Case="4-SMD, No Lead (DFN, LCC)", Supplier Part Number 1=CTX855CT-ND, Frequency=12MHz, Height="0.047\" (1.20mm)", Mounting Type="Surface Mount", Size / Dimension="0.236\" L x 0.138\" W (6.00mm x 3.50mm)", Supplier 1=Digi-Key

## Via types
v1: diameter 1, hole 0.5, Top Side to Bottom Side, 70 vias
v2: diameter 1.3, hole 1.1, Top Side to Bottom Side, 1 vias
v3: diameter 2, hole 1.5, Top Side to Bottom Side, 1 vias

## Nets (pads, with @x,y where several pads share a name; then routed paths per layer and width w, separated by ;. In a path a pad name is that pad's centre, name@x,y a point inside that pad or via, vN(x,y) a via of type N, cw(c..) or ccw(c..) an arc to the next point about the centre after c; other vN are vias at no path point)
3V3: 2.7 2.8 C1.1 C2.2 C7.2 C26.1 DL1.2 DL2.2 R12.2 TP3.1 TP9.1 U1.1 U1.8 U1.13 U1.22 U3.5 U7.6 VR1.1 VR1.4 | length 31.4
  Top Side w0.2: v1(32.766,41.808) DL1.2 DL2.2 ; v1(39.726,35.916) 40.506,35.135 U1.22 ; v1(43.993,31.09) U1.1 ; C1.1@45.11,39.421 45.709,39.421 45.983,39.146 ; U1.13@45.983,37.535 45.983,39.146 ; TP3.1 46.504,51.74 v1(49.581,51.74) ; v1(47.092,33.223) 48.474,33.223 C2.2 ; U1.8 48.566,34.735 49.048,34.253 C2.2@49.098,34.253 ; v1(47.473,39.091) 47.417,39.146 45.983,39.146
  Top Side w0.3: C26.1@18.984,35.753 U7.6 U7.6@18.984,37.027 ; v1(36.703,47.6) R12.2
  Top Side w0.5: v1(19.228,33.604) 19.242,33.618 C26.1 ; v1(35.281,9.627) 35.199,9.545 35.199,8.061 35.259,8.001 U3.5 35.263,6.223 TP9.1
3V3_RADIO: C12.2 R10.2 TP11.1 U5.5 | length 8
  Top Side w0.2: R10.2@2.744,59.326 R10.2@2.794,59.276
  Top Side w0.5: U5.5 2.199,51.645 2.199,52.986 2.222,53.009 2.21,53.021 2.21,56.566 TP11.1 2.286,57.15 R10.2
5V: C6.2 C10.2 C11.2 C25.1 H1.1 H3.1 L1.2 R3.1 TP12.1 U3.1 U3.3 U4.5 U5.1 U5.3 U7.1 | length 116.7
  Top Side w0.5: U3.3@32.334,4.319 U3.3 32.559,2.428 ; U3.1 28.321,6.219 28.321,4.103 28.614,3.81 31.053,3.81 C6.2 32.559,2.428 ; R3.1 47.634,2.794 H1.1 45.444,2.76 43.455,0.771 34.216,0.771 32.559,2.428
  Top Side w0.75: U5.1 2.145,48.891 2.145,47.625 2.083,47.563 2.083,46.38 ; U5.3 4.049,48.67 4.099,48.62 4.136,48.62 4.924,47.832 4.924,47.418 3.893,46.387 2.09,46.387 2.083,46.38 ; v1(5.969,26.924) 5.842,27.051 L1.2 ; H3.1 12.366,36.242 12.366,32.853 ; C25.1@19.217,40.692 19.242,40.717 C25.1 U7.1@19.242,39.529 ; C25.1@19.431,40.956 19.431,45.847 8.968,45.847 7.874,44.753 7.874,34.417 9.438,32.853 12.366,32.853 ; 2.083,46.38 2.083,36.678 5.842,32.918 L1.2 ; L1.2 5.87,29.464 C10.2 12.366,32.853
  Top Side w1: v1(13.335,15.748) TP12.1 ; v1(14.605,27.432) 14.632,27.405 U4.5
BAT_VDIV: R8.2 R11.1 U2.14 | length 147.1
  Top Side w0.2: v1(27.813,69.088) 27.813,67.997 29.25,66.56 U2.14
  Top Side w0.3: R11.1 v1(19.71,3.531) R8.2 R8.2@21.615,3.531
  Bottom Side w0.2: v1(19.71,3.531) 20.98,2.261 34.467,2.261 35.043,1.685 56.041,1.685 63.037,8.681 63.037,62.832 57.112,68.758 36.03,68.758 35.051,69.736 28.461,69.736 v1(27.813,69.088)
BUTTON: S2.1 U2.44 | length 18.8
  Top Side w0.2: S2.1 21.422,48.931 22.972,47.38 27.771,47.38 33.75,53.359 U2.44
BUZZER: R6.2 U2.3 | length 112
  Top Side w0.2: v1(34.239,68.986) 34.374,68.986 35.65,67.711 35.65,67.455 34.75,66.555 U2.3 ; R6.2@41.537,7.335 41.287,7.085 R6.2 42.506,8.204 v1(44.196,8.204)
  Bottom Side w0.2: v1(34.239,68.986) 35.306,68.986 35.865,68.428 35.909,68.428 36,68.337 36.165,68.337 36.18,68.351 57.023,68.351 62.687,62.687 62.687,8.865 62.027,8.204 v1(44.196,8.204)
COM_CE: U2.29 U6.3 | length 26.5
  Top Side w0.2: U6.3@5.207,66.926 5.207,64.491 11.948,57.75 U2.29
COM_CSN: U2.28 U6.4 | length 25.8
  Top Side w0.2: U6.4@6.114,67.2 6.114,64.244 12.108,58.25 U2.28
COM_IRQ: U2.30 U6.8 | length 25.4
  Top Side w0.2: v1(11.1,57.2) 26.425,57.2 U2.30 ; v1(11.1,62) 11.2,62.1 U6.8@11.2,67.2
  Bottom Side w0.2: v1(11.1,57.2) v1(11.1,62)
D_N: 1.2 R5.1 | length 32.5
  Top Side w0.381: R5.1@41.309,59.975 41.149,59.815 R5.1 42.697,59.715 43.068,60.086 44.678,60.086 44.682,60.082 48.84,60.082 50.149,61.392 50.149,71.853 57.011,78.714 59.265,78.714 1.2
D_P: 1.3 R4.1 | length 32.1
  Top Side w0.381: R4.1 42.586,61.087 42.951,60.721 44.941,60.721 44.945,60.717 48.577,60.717 49.514,61.655 49.514,72.116 56.747,79.349 59.265,79.349 1.3
DIP_0: S3.1 U2.16 | length 11.6
  Top Side w0.2: S3.1 21.92,71.679 27.686,65.913 28.227,65.913 28.25,65.89 U2.16
DIP_1: S3.2 U2.15 | length 10.5
  Top Side w0.2: S3.2 24.46,70.855 28.75,66.565 U2.15
DIP_2: S3.3 U2.13 | length 9.8
  Top Side w0.2: S3.3 27,72.441 29.083,70.358 29.083,67.817 29.75,67.15 U2.13
DIP_3: S3.4 U2.11 | length 9.2
  Top Side w0.2: S3.4 29.54,67.996 30.75,66.786 U2.11
GND: 1.5 1.6 2.5 2.6 C1.2 C2.1 C3.2 C4.1 C5.1 C6.1 C7.1 C9.1 C10.1 C11.1 C12.1 C13.1 C14.1 C15.2 C16.1 C17.2 C18.1 C19.2 C20.1 C21.2 C22.1 C24.1 C25.2 C26.2 D2.1 H2.1 H2.3 H3.3 Q1.2 R2.1 R7.1 R11.2 R14.2 S1.2 S2.2 S3.5 S3.6 S3.7 S3.8 S4.2 TP5.1 TP6.1 TP7.1 TP8.1 U1.9 U1.11 U1.18 U1.20 U2.2 U2.17 U2.46 U2.60 U3.2 U4.7 U4.EPAD U5.2 U6.2 U7.2 U7.5 VR1.3 VR1.6 VR1.8 VR1.9 | length 200
  Top Side w0.2: TP6.1 19.141,53.442 S2.2 19.202,53.38 21.539,53.38 ; v1(18.593,71.45) 18.593,69.128 S4.2@19.05,68.671 ; v1(21.514,55.956) 21.539,55.931 21.539,53.38 ; v1(21.615,60.173) 21.641,60.198 C17.2 ; v1@21.737,64.445 v1(21.869,64.313) 22.936,63.246 C20.1 23.176,63.537 23.892,64.252 26.448,64.252 26.475,64.226 U2.17 ; S3.8 S3.7 S3.6 29.53,83.1 S3.5 31.464,83.09 v1(31.496,83.058) ; S1.2 21.539,53.38 ; v1(25.806,10.795) 26.357,10.244 26.357,8.545 R7.1@26.416,8.487 ; C15.2 C18.1 32.704,69.661 33.579,70.536 v1(33.579,70.714) ; v1(34.29,47.879) 34.29,48.997 34.798,49.505 C22.1 34.798,50.495 C22.1@34.976,50.673 ; v1(34.417,60.96) 35.207,61.75 U2.60 ; U2.46 34.75,52.169 v1(34.798,52.121) ; U2.2 35.25,66.56 36.043,67.353 36.043,67.64 36.906,68.504 C16.1 36.906,70.053 v1(36.957,70.104) R14.2 ; VR1.9 VR1.8 39.31,17.52 VR1.8@39.31,17.437 ; v1(39.319,14.961) 39.31,14.97 VR1.8@39.31,17.437 ; v1(39.954,70.155) 40.585,70.786 40.978,70.786 C24.1 ; U1.20 41.586,35.935 41.543,35.978 41.543,36.94 41.58,36.977 v1(41.58,38.125) 41.611,38.094 43.434,38.094 ; C1.2 43.434,39.41 43.434,38.094 ; U1.18 43.434,38.094 ; VR1.6 44.846,11.9 VR1.8@39.31,17.437 ; TP7.1 v1(49.759,48.285) ; U1.9 49.321,35.135 49.419,35.038 50.622,35.038 C3.2@51.308,35.724 ; U1.11 48.916,35.935 49.419,36.438 50.622,36.438 C3.2 C3.2@51.308,35.724 ; C4.1 47.2,65.728 v1(48.209,64.719) 48.209,62.709 C5.1 ; C2.1 49.541,32.599 50.635,33.693 ; v1(51.308,32.918) 51.308,33.02 50.635,33.693 ; 1.6@59.273,76.857 60.773,76.857 61.773,75.857 1.6@61.973,75.857 ; 1.6@59.273,81.857 1.5 60.648,80.657 60.948,80.357 1.6@61.973,80.357 ; v1(60.706,71.374) 60.706,73.54 60.723,73.557 60.723,74.307 61.973,75.557 1.6@61.973,75.857 ; 1.6@61.973,82.857 1.6@61.973,80.357 ; 50.635,33.693 51.308,34.366 C3.2@51.308,35.724 ; 1.6@61.973,75.857 61.973,78.357 1.6@61.973,80.357
  Top Side w0.3: C26.2@18.034,35.752 U7.5 U7.5@18.034,37.027 ; TP5.1 34.548,17.53 VR1.8 ; VR1.8@39.22,17.526 VR1.8@39.31,17.437 ; TP8.1@55.212,82.136 TP8.1 55.1,81.857 1.6@59.273,81.857
  Top Side w0.5: v1(3.099,50.292) U5.2 3.099,47.436 C11.1 ; C11.1@3.141,47.521 C11.1@3.291,47.371 ; C12.1 v1(6.274,52.959) ; U6.2 3.811,64.262 3.937,64.136 3.937,62.484 v1(5.08,61.341) ; H2.1 14.613,3.531 R11.2 ; v1(16.993,33.579) 17.842,34.428 C26.2 ; v1(29.75,5.239) 29.767,5.256 31.099,5.256 C6.1 31.118,5.269 U3.2 ; v1(32.258,8.128) 32.321,8.065 33.654,8.065 C7.1 ; v1(38.989,3.175) 39.751,3.175 Q1.2
  Top Side w0.6: U7.2 C25.2@18.034,40.525
  Top Side w0.75: v1(17.831,42.037) 17.831,40.778 C25.2 17.842,40.717 C25.2@18.034,40.525
  Top Side w1: D2.1 9.775,14.75 11.836,12.689 v1(11.836,12.675) ; H3.3 v1(12.446,44.323) ; C10.1 19.52,29.464 C9.1 19.774,28.31 19,27.536 v3(19,25.5) 18.646,25.5 18.646,25.046 18.6,25 18.013,25 17.878,24.865 U4.7
  Bottom Side w0.2: C19.2 32.907,62.419 33.223,62.103 ; C14.1 33.223,62.103 ; v1(34.29,47.879) 34.798,48.387 v1(34.798,52.121) ; C21.2@34.29,60.263 34.29,60.833 v1(34.417,60.96) 34.366,60.96 33.223,62.103
  Bottom Side w0.3: v1@12.37,44.399 v1(12.446,44.323)
  Bottom Side w1: v1(10.566,6.071) 10.573,6.064 12.08,6.064 ; H2.1 12.08,6.064 ; H2.3 12.08,6.529 12.08,6.064
I2C_SCL: TP2.1 U1.23 U2.33 | length 40.1
  Top Side w0.2: v1(28.232,56.282) 28.241,56.273 28.241,54.484 U2.33 ; v1(39.1,53.2) 39.1,46.634 ; TP2.1 42.24,46.634 39.1,46.634 ; U1.23 39.033,34.735 38.493,35.275 38.493,42.634 39.1,43.241 39.1,46.634
  Bottom Side w0.2: v1(28.232,56.282) 28.3,56.282 30.832,53.75 38.4,53.75 38.95,53.2 v1(39.1,53.2)
I2C_SDA: TP1.1 U1.24 U2.49 | length 30.4
  Top Side w0.2: TP1.1 34.595,37.262 38.143,37.262 ; U2.49 38.35,55.425 38.35,52.37 38.653,52.067 38.653,43.289 38.143,42.779 38.143,37.262 ; U1.24 38.938,34.335 38.143,35.13 38.143,37.262
JOYSTICK_2: U2.5 VR1.2 | length 77.1
  Top Side w0.2: v1(33.274,67.437) 33.274,67.328 33.75,66.852 U2.5
  Bottom Side w0.2: v1(33.274,67.437) 33.274,67.574 33.9,68.2 35.55,68.2 35.9,67.85 56.786,67.85 62.3,62.336 62.3,25.1 VR1.2
JOYSTICK_5: U2.4 VR1.5 | length 87
  Top Side w0.2: U2.4 34.25,66.899 34.584,67.234 v1(34.584,67.45)
  Bottom Side w0.2: v1(34.584,67.45) 34.634,67.4 56.6,67.4 61.8,62.2 61.8,29.8 49.1,17.1 VR1.5
JOYSTICK_SW: U2.41 VR1.7 VR1.10 | length 83.7
  Top Side w0.2: U2.41 32.258,54.483 32.258,55.626 32.732,56.1 v1(32.9,56.1) ; VR1.7 VR1.10
  Bottom Side w0.2: v1(32.9,56.1) 32.9,54.295 33.045,54.15 53.904,54.15 56.626,54.386 cw(c56.718,53.315) 56.666,54.388 61.009,54.6 61.174,54.6 61.233,54.541 61.35,54.424 61.35,29.986 55.432,24.068 44.002,24.068 VR1.10
LED_STRIP_3V3: U2.43 U7.4 | length 29.1
  Top Side w0.2: U7.4 17.084,37.7 17.457,38.073 24.97,38.073 31.191,44.295 v1(31.191,46.787) ; v1(31.039,52.045) 31.5,52.045 33.25,53.795 U2.43
  Bottom Side w0.2: v1(31.039,52.045) 31.191,51.892 v1(31.191,46.787)
LED_STRIP_5V: H3.2 U7.3 | length 4.7
  Top Side w0.75: H3.2 14.605,38.862 15.113,39.37 U7.3@16.916,39.37
NetC3_1: C3.1 U1.10 | length 2.9
  Top Side w0.2: U1.10 49.72,35.535 C3.1
NetC4_2: C4.2 U2.62 Y1.3 | length 11.3
  Top Side w0.2: U2.62 38.776,62.75 40.676,64.65 43.55,64.65 44.7,65.8 Y1.3 45.8,65.9 C4.2
NetC5_2: C5.2 U2.61 Y1.1 | length 9.6
  Top Side w0.2: U2.61 37.55,62.225 39.125,62.225 40.3,63.4 Y1.1 43,61.9 C5.2
NetC8_1: C8.1 U4.1 | length 2.4
  Top Side w1: 20.004,22.098 20.496,22.098 20.997,22.599 20.997,23.349 21.243,23.595 U4.1
NetC8_2: C8.2 D2.2 L1.1 U4.8 | length 21.1
  Top Side w1: D2.2 5.842,18.217 L1.1 10.767,20.292 14.097,23.622 16.662,23.622 U4.8 16.689,22.684 17.274,22.098 C8.2
NetC13_2: C13.2 R10.1 U6.1 | length 4.9
  Top Side w0.2: C13.2@2.187,64.112 C13.2
  Top Side w0.5: R10.1@2.54,62.103 U6.1
NetC14_2: C14.2 C16.2 C18.2 C20.2 C22.2 R12.1 U2.1 U2.7 U2.18 U2.45 U2.58 | length 42.3
  Top Side w0.2: C20.2@24.576,63.373 24.699,63.25 U2.18 28.317,63.25 v1(28.346,63.221) ; C18.2 32.004,67.306 32.75,66.56 U2.7 32.75,64.49 33.359,63.881 v1(33.528,63.881) 35.141,63.881 35.75,64.49 U2.1 36.601,66.376 C16.2@36.601,66.94 ; C22.2 33.398,51.446 ; v1@35.719,60.75 U2.58 ; v1(35.89,56.871) 35.154,56.134 34.671,56.134 34.25,55.713 U2.45 34.25,53.44 34.1,53.29 34.1,53.15 33.398,52.448 33.398,51.446 ; R12.1@36.734,50.845 36.639,50.749 35.763,50.749 35.368,51.144 34.714,51.144 34.412,51.446 33.398,51.446
  Top Side w0.3: C22.2 C22.2@33.648,50.694 ; R12.1@36.47,50.845 R12.1@36.734,50.845
  Top Side w0.381: v1(35.712,60.757) v1@35.719,60.75
  Bottom Side w0.2: v1(28.346,63.221) 28.436,63.131 32.778,63.131 v1(33.528,63.881) 34.271,63.138 34.444,63.138 35.099,62.483 35.099,62.31 35.343,62.066 35.712,62.066 v1(35.712,60.757) 35.712,59.878 36.437,59.153 36.437,57.417 v1(35.89,56.871)
NetC15_1: C15.1 C17.1 C19.1 C21.1 L2.2 U2.8 U2.12 U2.24 U2.54 | length 41.8
  Top Side w0.2: C17.1@24.464,60.25 U2.24 27.874,60.25 28.973,61.35 ; U2.12 30.25,63.905 v1(30.226,63.881) ; C15.1 30.607,67.437 31.115,66.929 31.881,66.929 32.25,66.56 U2.8 32.25,64.49 31.641,63.881 v1(30.226,63.881) ; U2.54 35.738,58.75 v1(35.687,58.801) 31.522,58.801 28.973,61.35 ; L2.2 38.505,66.112 36.195,63.802 36.195,63.109 36.078,62.992 31.115,62.992 v1(30.226,63.881) ; 28.973,61.35 28.973,62.628 v1(30.226,63.881)
  Top Side w0.381: C17.1@24.387,60.173 C17.1@24.464,60.25
  Bottom Side w0.2: v1(30.226,63.881) 31.586,63.881 C19.1@31.648,63.819 ; C21.1@34.29,58.863 34.352,58.801 v1(35.687,58.801)
NetC23_1: C23.1 C24.2 L2.1 U2.64 | length 10.2
  Top Side w0.2: U2.64 37.95,63.75 37.973,63.773 37.973,64.54 L2.1 41.554,68.121 C24.2 42.14,70.549 C23.1
NetC23_2: C23.2 R14.1 | length 3.7
  Top Side w0.2: R14.1 39.663,72.149 C23.2
NetD1_1: D1.1 H1.2 Q1.3 | length 12.4
  Top Side w0.5: Q1.3 42.211,2.921 43.688,2.921 46.067,5.3 H1.2 48.642,6.342 D1.1
NetD1_3: D1.3 R3.2 | length 3
  Top Side w0.5: R3.2@54.483,2.794 D1.3
NetDL1_1: DL1.1 R13.1 | length 1.8
  Top Side w0.2: DL1.1 R13.1
NetDL2_1: DL2.1 R15.1 | length 1.8
  Top Side w0.2: DL2.1 R15.1
NetF1_1: F1.1 Q2.3 | length 2.6
  Top Side w0.5: F1.1 Q2.3@22.133,6.35
NetQ1_1: Q1.1 R6.1 | length 2
  Top Side w0.5: R6.1 42.829,6.943 Q1.1
NetQ2_1: Q2.1 R7.2 | length 1.9
  Top Side w0.3: Q2.1 23.216,8.484 R7.2@25.07,8.484
NetR4_2: R4.2 U2.57 | length 2.5
  Top Side w0.2: U2.57 38.546,60.25 38.857,60.56 39.109,60.56 R4.2
NetR5_2: R5.2 U2.56 | length 2.1
  Top Side w0.2: U2.56 37.56,59.715 R5.2
NetR9_1: R9.1 U4.3 | length 1.8
  Top Side w0.3: U4.3 23.026,26.135 R9.1
NetTP4_1: TP4.1 U2.55 | length 13
  Top Side w0.2: U2.55 38.189,59.25 38.616,59.25 38.916,58.95 43.35,58.95 43.6,59.2 v1(43.8,59.2) ; v1(43.8,55.4) TP4.1
  Bottom Side w0.2: v1(43.8,55.4) v1(43.8,59.2)
nRST: 2.1 S1.1 U2.39 | length 41.7
  Top Side w0.2: U2.39 31.275,54.5 31.275,56.875 v1(31.3,56.9) ; 2.1@57.2,58.4 2.1@57.4,58.6
  Top Side w0.3: S1.1 24.327,49.331 27.141,49.331 31.25,53.44 U2.39
  Bottom Side w0.2: v1(31.3,56.9) 34.7,56.9 37,54.6 54.143,54.6 55.681,56.139 cw(c56.718,55.855) 56.434,56.891 56.718,57.175 2.1
SLEEP: S4.1 U2.20 | length 9.7
  Top Side w0.2: S4.1@19.05,64.171 18.517,63.638 18.517,62.901 19.167,62.25 U2.20
SPI_MISO: TP15.1 U2.27 U6.7 | length 30
  Top Side w0.2: U6.7@9.929,67.2 9.929,61.141 12.319,58.75 U2.27
  Top Side w0.3: U6.7 10.169,68.551 10.344,68.727 12.344,68.727 12.72,68.351 12.72,68.326 TP15.1@14.605,68.326
SPI_MOSI: TP14.1 U2.22 U6.6 | length 22.5
  Top Side w0.2: v1(8.6,63.5) 8.657,63.557 U6.6@8.657,67.2 ; v1(12.96,63.367) 13.037,63.29 14.79,63.29 16.83,61.25 U2.22
  Bottom Side w0.2: v1(8.6,63.5) 8.667,63.433 12.894,63.433 v1(12.96,63.367)
SPI_SPCK: TP13.1 U2.21 U6.5 | length 28
  Top Side w0.2: U6.5@7.386,67.2 7.5,67.086 v1(7.5,64.6) ; TP13.1 12.073,62.527 v1(12.073,64.6) 13.988,64.6 16.838,61.75 U2.21
  Bottom Side w0.2: v1(7.5,64.6) v1(12.073,64.6)
STATUS0: R13.2 U2.48 | length 12.4
  Top Side w0.2: U2.48 38.303,51.922 38.303,44.093 R13.2
STATUS1: R15.2 U2.47 | length 11
  Top Side w0.2: U2.47 35.25,53.44 37.948,50.742 37.948,45.033 R15.2
SWCLK: 2.2 U2.53 | length 23.3
  Top Side w0.2: U2.53 42.043,58.25 42.093,58.2 46.2,58.2 v1(47,59)
  Bottom Side w0.2: v1(47,59) 53.514,59 54.712,60.198 57.455,60.198 2.2
SWDIO: 2.4 U2.51 | length 22.3
  Top Side w0.2: U2.51 57.863,57.25 2.4
USB_DETECT: R1.1 R2.2 U2.52 | length 34.4
  Top Side w0.2: U2.52 47.45,57.75 50.8,61.1 50.8,71.6 52.733,73.533 R1.1@57.461,73.533 ; R1.1 57.323,73.557 57.461,73.557 R2.2@59.023,73.557
V_BATT: F1.2 H2.2 | length 2.3
  Top Side w1: H2.2 14.414,6.323 16.608,6.323 F1.2 ; F1.2@16.835,6.297 F1.2@16.863,6.325
V_BATT_FUSED: C9.2 Q2.2 R8.1 R9.2 TP10.1 U4.2 U4.4 | length 39.1
  Top Side w0.3: R8.1 25.044,3.531 TP10.1@25.756,2.819 ; v1(23.647,5.055) 23.647,5.01 24.155,4.502 24.155,3.706
  Top Side w1: Q2.2 21.3,10.709 v1(21.361,10.77) 21.361,16.358 ; U4.2 21.326,24.85 23.459,24.85 24.13,24.179 ; 21.336,16.383 24.13,19.177 24.13,24.179 ; C9.2 21.374,29.11 21.311,29.047 U4.4 22.972,27.405 R9.2 23.544,27.547 24.214,26.877 24.214,24.263 24.13,24.179
  Bottom Side w0.3: v1(21.361,10.77) 21.361,7.341 v1(23.647,5.055)
VBUS: 1.1 R1.2 | length 4.5
  Top Side w0.2: R1.2 57.273,77.157 58.173,78.057 1.1
pads on no net: 1.4 2.3 2.9 2.10 D1.2 U1.2 U1.3 U1.4 U1.5 U1.6 U1.7 U1.12 U1.14 U1.15 U1.16 U1.17 U1.19 U1.21 U2.6 U2.9 U2.10 U2.19 U2.23 U2.25 U2.26 U2.31 U2.32 U2.34 U2.35 U2.36 U2.37 U2.38 U2.40 U2.42 U2.50 U2.59 U2.63 U3.4 U4.6 U5.4 VR1.11 VR1.12 VR1.13 VR1.14 Y1.2 Y1.4
copper on no net:
  other v2: 44.993,35.335

## Polygon pours and split planes (outlines as drawn)
GND on Ground Plane (split plane): 63.49,0.51 0.51,0.51 0.51,71.6 13.9,71.6 20,77.7 20,84.49 63.49,84.49
3V3 on Power Plane (split plane): 63.49,0.51 27.917,0.51 27.917,0.601 27.939,0.606 27.972,0.628 27.994,0.661 28.002,0.7 28.002,8.6 27.994,8.639 27.972,8.672 26.829,9.815 26.829,27.2 26.82,27.25 26.792,27.292 23.092,30.992 23.05,31.02 23,31.029 0.51,31.029 0.51,71.6 14,71.6 20,77.6 20,84.49 63.49,84.49
5V on Power Plane (split plane): 26.571,27.146 26.571,9.419 26.58,9.369 26.608,9.327 27.658,8.278 27.658,0.51 0.655,0.51 0.51,0.655 0.51,30.771 22.946,30.771
5V on Power Plane (split plane): 27.798,8.558 27.798,8.504 26.829,9.472 26.829,9.526

## Other copper
Ground Plane (plane layer: these items are gaps in the copper):
  pour cut-out: 0,85 0,71.6 13.9,71.6 20,77.7 20,85
Power Plane (plane layer: these items are gaps in the copper):
  region: 0,85 0,71.6 14,71.6 20,77.6 20,85
  lines w0.2: 0,30.9 0,1.021 1.021,0 27.2,0 ; 0,34.2 0,62.1 ; 23,30.9 26.7,27.2 26.7,9.8 27.9,8.6 27.9,0.7
  lines w0.254: 0,30.9 23,30.9 26.7,27.2 26.7,9.419 27.788,8.331 27.788,0.025

## Silkscreen, mask and mechanical layers (free items; w line width, h text height)
Top Overlay: